# Altium PCB ArduinoUnoR3.PcbDoc (part 2 of 2)
Units mm, origin at the board's own origin, x right, y up, seen from the top; angles counter-clockwise.
Board outline 68.53 x 53.3 mm, 2 copper layers (Top Layer, Bottom Layer); 60 components, 49 nets, 221 pads, 41 vias.
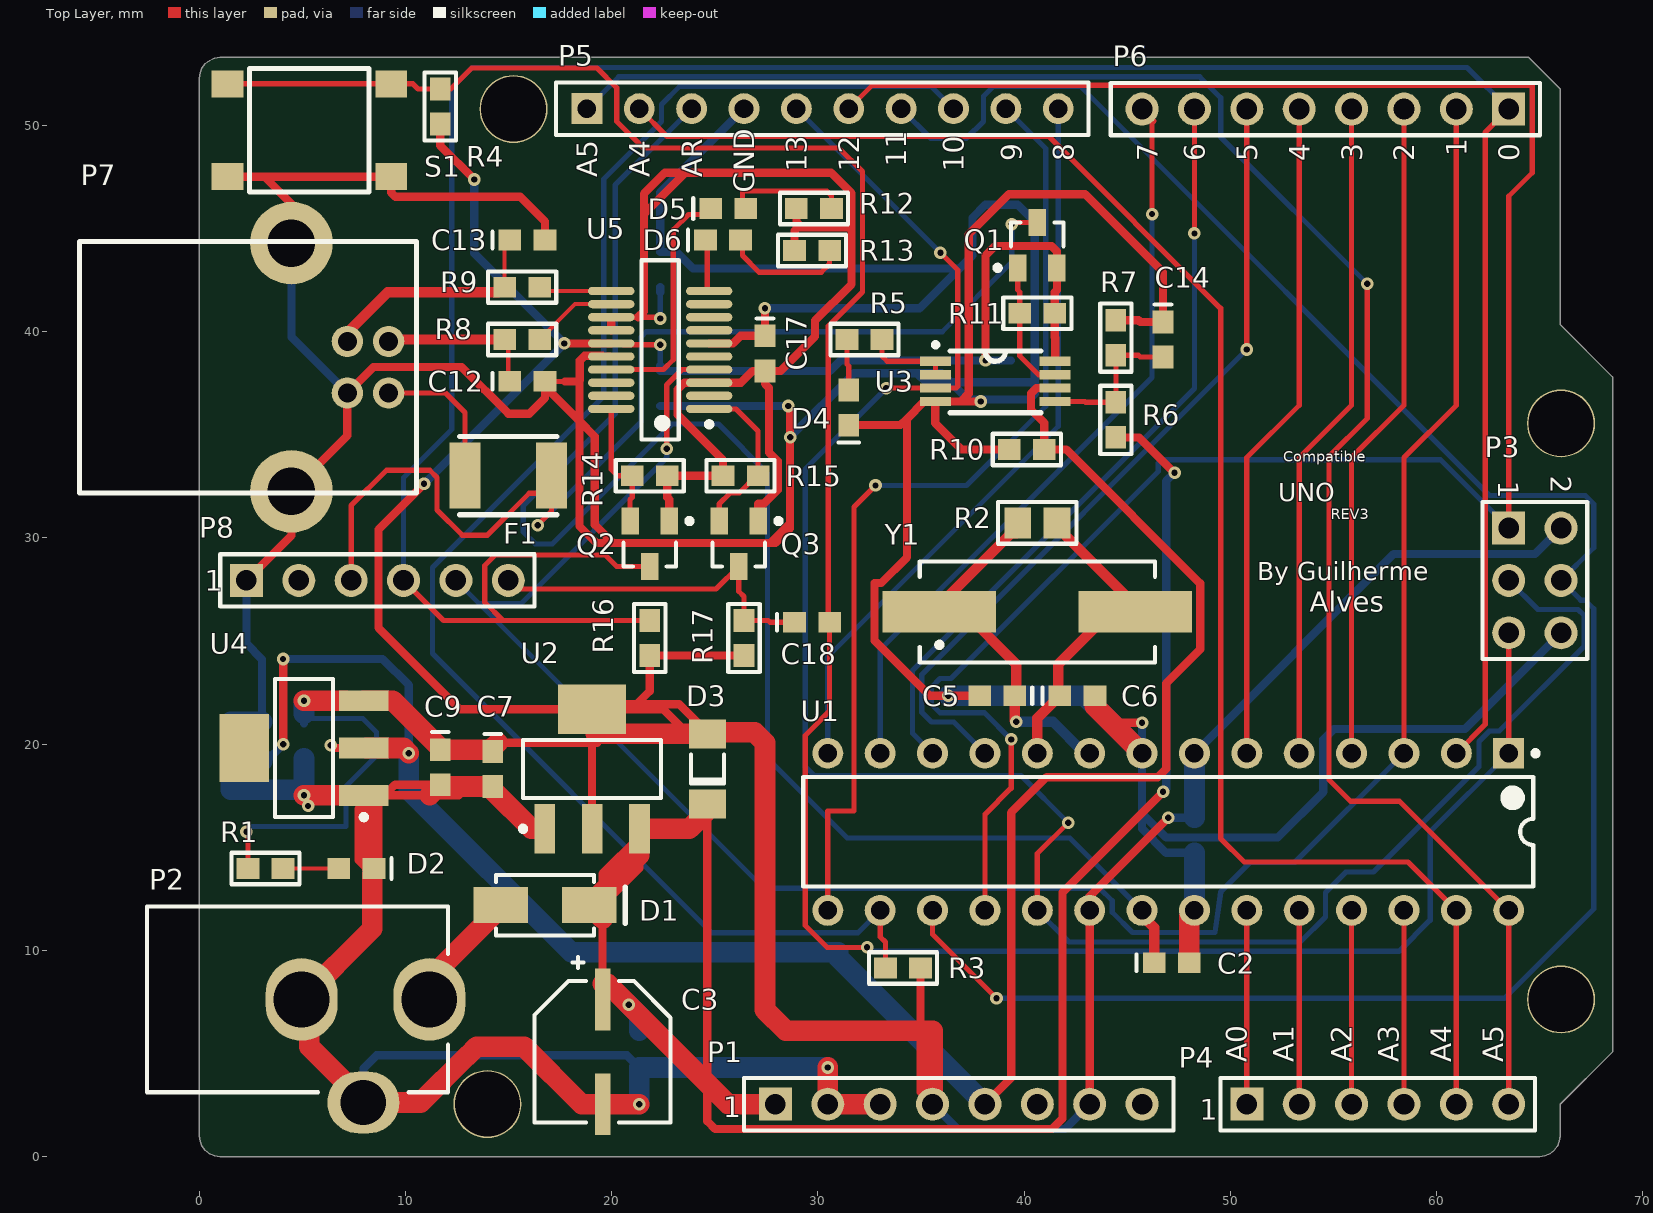
[diagram p0: Top Layer view]

## Part data (continued)
U5: "USB to Full-Handshake UART Interface Chip, UHCI/OHCI/EHCI Compatible, USB 2.0 Compatible, -40 to +85 degC, 20-Pin SSOP, Pb-Free, Tape and Reel", Case/Package=SSOP, Manufacturer=FTDI, Max Operating Temperature=85°C, Max Supply Voltage=5.5V, Min Operating Temperature=-40°C, Min Supply Voltage=2.97V, Operating Supply Current=8mA, Operating Supply Voltage=5V, Package Quantity=2000, Supplier Part Number 1=768-1129-6-ND, Code_JEDEC=MO-137-AD, ComponentLink1Description="Manufacturer URL", ComponentLink1URL=http://www.ftdichip.com/, ComponentLink2Description=Datasheet, ComponentLink2URL=http://www.ftdichip.com/Support/Documents/DataSheets/ICs/DS_FT231X.pdf, ComponentLink3Description="FT231X Product Page", ComponentLink3URL=www.ftdichip.com/Products/ICs/FT231X.html, ComponentLink4Description=http://uk.rs-online.com/webdocs/1102/0900766b811020d3.pdf, ComponentLink4URL=http://uk.rs-online.com/webdocs/1102/0900766b811020d3.pdf, ComponentLink5Description=https://media.digikey.com/pdf/Data%20Sheets/FTDI%20Chip%20PDFs/X-Chip_Series_Errata.pdf, ComponentLink5URL=https://media.digikey.com/pdf/Data%20Sheets/FTDI%20Chip%20PDFs/X-Chip_Series_Errata.pdf, ComponentLink6Description=http://www.alliedelec.com/images/products/datasheets/bm/FTDI/70403932.pdf, ComponentLink6URL=http://www.alliedelec.com/images/products/datasheets/bm/FTDI/70403932.pdf, Data Rate=12Mbps, DatasheetVersion="ver 1.2, Feb-2013", Height=0.059inch, Interface=UART,USB, Length=8.74mm, Manufacturer Part Number=FT231XS-R, Mount="Surface Mount", Number of Channels=1, Number of Pins=20, PackageDescription="20-Pin Small Outline Package, 8.6 x 3.9 mm Body, 0.635 mm Pitch", PackageReference=SSOP-20, PackageVersion=Feb-13, Packaging="Tape and Reel", PartNumber=FT231XS-R, Pricing 1="1=2.12, 25=2.05, 100=1.98, 250=1.78, 500=1.60002 (USD)", Radiation Hardening=No, Stock 1=8392, Supplier 1=Digi-Key, Weight=0.016oz, Width=0.157inch
Y1: library part XTAL, "Crystal Oscillator", ESR (Equivalent Series Resistance)=50R, Frequency Stability=50ppm, Frequency Tolerance=30ppm, Load Capacitance=20pF, Manufacturer Part Number=ECS-160-20-3X-TR, Max Operating Temperature=70°C, Min Operating Temperature=-10°C, Package Quantity=1, Supplier Part Number 1=XC1776DKR-ND, Frequency=16MHz, Height=0.091inch, Lead Free="Lead Free", Length=0.276inch, Mount="Surface Mount", Packaging="Tape and Reel", Pricing 1="1=0.38, 10=0.316, 50=0.2846, 100=0.253, 500=0.24036, 1000=0.2024 (USD)", Stock 1=30831, Supplier 1=Digi-Key, Termination=SMD/SMT, Tolerance=30ppm, Width=0.161inch

## Free pads (board coordinates)
  round 3.3 hole 3.15: 1(13.97,2.54) 2(66.04,7.62) 3(66.04,35.56) 4(15.24,50.8)

## Via types
v1: diameter 0.61, hole 0.305, Top Layer to Bottom Layer, 41 vias

## Nets (pads, with @x,y where several pads share a name; then routed paths per layer and width w, separated by ;. In a path a pad name is that pad's centre, name@x,y a point inside that pad or via, vN(x,y) a via of type N, cw(c..) or ccw(c..) an arc to the next point about the centre after c; other vN are vias at no path point)
+3V3D: C11.2 P1.5 R10.1 U3.6 U4.2 | length 102.9
  Top Layer w0.4: v1(4.064,24.13) 4.075,24.119 v1(4.075,19.995) ; v1(6.376,19.95) 6.514,19.812 U4.2 U4.2@8.128,19.812 ; P1.5 39.371,3.811 39.371,16.675 41.096,18.4 46.483,18.4 46.889,18.807 46.889,22.947 48.54,24.598 48.54,27.798 42.049,34.29 R10.1 40.982,35.571 40.336,36.216 40.336,37.013 40.59,37.267 U3.6
  Top Layer w1: U4.2@8.128,19.812 9.906,19.812 v1(10.16,19.558)
  Bottom Layer w0.4: C11.2 3.262,19.182 v1(4.075,19.995) ; v1(4.064,24.13) 8.89,24.13 10.16,22.86 v1(10.16,19.558) ; v1(6.376,19.95) v1@6.382,19.944
  Bottom Layer w1: C11.2 C11.2@3.048,19.304 ; v1(10.16,19.558) 10.16,17.78 18.034,9.906 30.988,9.906 30.988,9.652 P1.5
+3V3E: C15.2 C17.2 Q2.1 Q3.1 R12.2 R13.2 R14.1 R15.2 U5.3 U5.13 U5.14 | length 63.3
  Top Layer w0.254: U5.13 21.286,40.704 21.288,40.704 22.288,40.704 v1(22.352,40.64)
  Top Layer w0.4: U5.14 U5.13 ; 21.286,40.704 21.566,40.983 ; 21.288,40.704 21.566,40.981 21.566,40.983 ; Q2.1 22.794,31.862 22.694,31.962 R14.1 R15.2 25.4,33.768 23.191,35.977 23.191,37.198 23.521,37.529 U5.3 26.265,37.529 26.836,38.1 C17.2 ; Q3.1 27.112,31.659 27.39,31.659 28.05,32.319 28.05,33.725 27.627,34.148 27.627,37.281 27.432,37.476 C17.2 ; R13.2 28.868,44.892 28.956,44.98 28.956,45.324 ; R12.2 28.956,45.324 ; 21.566,40.983 21.566,45.705 ; 21.566,45.705 21.566,46.696 22.582,47.712 23.572,47.712 ; 21.566,45.705 23.572,47.712 ; 23.572,47.712 30.633,47.712 31.624,46.721 31.624,45.324 ; C17.2 28.195,38.1 29.863,39.768 29.863,40.541 31.624,42.302 31.624,45.324 ; 28.956,45.324 29.21,45.07 31.37,45.07 31.624,45.324
  Bottom Layer w0.254: v1(22.352,40.64) C15.2@22.352,41.91
  Bottom Layer w0.4: C15.2@22.352,41.91 C15.2
+5VD: C1.1 C7.1 C8.1 C9.1 C10.2 C16.1 D3.1 P1.4 P1.7 P3.2 Q1.2 R1.1 R3.1 R4.1 R11.2 R16.1 R17.2 U1.7 U1.20 U2.2 U3.8 U4.3 U5.15 | length 231.6
  Top Layer w0.254: v1(2.286,15.748) 2.364,15.67 R1.1 ; U4.3@7.112,22.098 7.126,22.112 U4.3 ; U5.15 20.51,39.434 20.574,39.37 v1(22.352,39.37)
  Top Layer w0.4: v1(10.898,32.624) 8.688,30.414 8.688,25.639 12.631,21.696 U2.2@19.05,21.696 ; C9.1@11.684,19.812 14.098,19.812 14.352,20.066 14.478,20.066 19.05,20.066 ; R4.1 11.684,49.034 v1(13.336,47.382) ; v1(17.705,39.434) U5.15 ; U2.2@19.05,15.896 19.05,16.002 19.05,20.066 ; U2.2@19.226,20.496 U2.2@20.426,21.696 ; 19.304,20.066 19.05,20.066 ; D3.1 23.693,20.496 22.493,21.696 20.974,21.696 ; D3.1@24.638,20.574 23.281,21.931 21.209,21.931 ; R17.2 R16.1 21.844,22.566 21.209,21.931 ; R3.1 34.974,6.096 34.974,3.126 P1.4 ; v1(38.126,38.608) 38.126,43.699 38.584,44.156 41.336,44.156 41.59,43.902 Q1.2 41.59,42.021 41.49,41.921 R11.2 41.49,39.729 41.508,39.711 U3.8 ; P1.7 U1.20 43.156,11.938 43.156,12.597 v1(46.991,16.432) ; 19.05,20.066 U2.2@19.05,21.696 ; U2.2@19.05,21.696 U2.2@20.426,21.696 ; U2.2@20.426,21.696 20.974,21.696 ; U2.2@20.426,21.696 20.661,21.931 21.209,21.931 ; 20.974,21.696 21.209,21.931
  Top Layer w1: v1(5.08,22.098) U4.3@7.112,22.098 ; U4.3 9.384,22.112 C9.1@11.684,19.812 ; C9.1 14.146,19.734 C7.1@14.224,19.812 ; C7.1 C7.1@14.224,19.812 ; C7.1@14.478,20.066 C7.1@14.224,19.812 ; U2.2@19.226,20.496 23.693,20.496 ; D3.1@24.638,20.574 26.924,20.574 27.432,20.066 27.432,7.112 28.448,6.096 34.974,6.096 35.56,6.096 P1.4
  Bottom Layer w0.254: v1(2.286,15.748) 2.54,16.002 7.112,16.002 7.112,17.956 8.592,19.436 8.592,20.574 7.927,21.239 5.177,21.239 5.08,21.142 5.05,21.112 C10.2 ; C16.1@22.352,38.354 v1(22.352,39.37)
  Bottom Layer w0.4: C10.2 5.08,21.142 C10.2@5.08,21.472 ; v1(10.898,32.624) 10.898,32.626 v1(17.705,39.434) 13.336,43.802 v1(13.336,47.382) ; C16.1@22.352,38.354 C16.1 30.583,38.1 31.091,38.608 v1(38.126,38.608) C8.1 ; P1.4 36.769,1.331 41.971,1.331 P1.7 ; v1(46.991,16.432) C1.1 ; U1.7 57.923,29.221 64.781,29.221 P3.2
  Bottom Layer w1: C10.2@5.08,21.472 v1(5.08,22.098) ; C1.1 U1.7
+VIN: C3.1 C4.1 D1.2 D3.2 P1.1 R6.1 U2.3 | length 105.2
  Top Layer w0.4: D1.2 D1.2@19.558,12.192 ; C3.1 19.558,8.382 19.558,11.548 D1.2@19.558,12.192 ; D1.2@19.559,12.192 21.35,13.983 U2.3 ; U2.3@21.336,15.494 19.558,13.716 19.558,12.836 D1.2@19.558,12.192 ; D3.2 24.638,16.764 24.638,3.556 24.638,1.713 25.02,1.331 41.352,1.331 41.86,1.839 41.86,12.812 v1(46.737,17.689) ; R6.1 45.577,34.876 v1(47.296,33.158)
  Top Layer w1: C3.1@19.558,8.382 19.812,8.382 v1(20.828,7.366) 24.638,3.556 25.654,2.54 P1.1 ; D1.2@19.558,11.548 D1.2 19.558,12.836 21.336,14.614 U2.3@21.336,15.494 ; U2.3 23.77,15.896 D3.2@24.638,16.764
  Bottom Layer w0.4: C4.1@21.336,5.88 C4.1 C4.1@21.336,6.096 ; v1(46.737,17.689) 46.889,17.841 46.889,32.751 v1(47.296,33.158)
  Bottom Layer w1: v1(20.828,7.366) 21.336,6.858 C4.1@21.336,6.096
A0: P4.1 U1.23 | length 9.4
  Top Layer w0.254: P4.1 U1.23
A1: P4.2 U1.24 | length 9.4
  Top Layer w0.254: P4.2 U1.24
A2: P4.3 U1.25 | length 9.4
  Top Layer w0.254: P4.3 U1.25
A3: P4.4 U1.26 | length 9.4
  Top Layer w0.254: P4.4 U1.26
A4_SDA: P4.5 P5.2 U1.27 | length 80.2
  Top Layer w0.254: P5.2 22.69,49.463 41.201,49.463 49.531,41.133 49.531,15.428 50.674,14.285 58.613,14.285 U1.27 P4.5
A5_SCL: P4.6 P5.1 U1.28 | length 89.3
  Top Layer w0.254: v1(56.643,42.327) 56.643,35.799 54.789,33.945 54.789,18.273 55.83,17.232 58.206,17.232 U1.28 P4.6
  Bottom Layer w0.254: P5.1 20.339,52.36 48.515,52.36 49.531,51.344 49.531,49.439 v1(56.643,42.327)
AREF: C2.1 P5.3 U1.21 | length 77.6
  Top Layer w0.254: U1.21@45.466,11.938 U1.21
  Top Layer w0.5: U1.21@45.466,11.938 45.593,11.811 46.306,11.098 C2.1
  Bottom Layer w0.254: P5.3 20.169,47.109 20.169,36.012 15.714,31.557 15.714,30.287 16.298,29.703 17.121,29.703 22.937,35.52 25.172,35.52 27.56,33.132 27.56,19.315 31.426,15.448 42.21,15.448 U1.21
D0_RX: P6.1 P8.4 Q2.3 R16.2 U1.2 | length 133.9
  Top Layer w0.254: P8.4 11.85,25.996 14.732,25.996 ; R16.2 14.732,25.996 ; Q2.3 21.844,28.611 20.245,28.611 19.686,29.17 14.352,29.17 13.844,28.662 13.844,26.884 14.732,25.996 ; U1.2 62.358,20.956 62.358,49.658 P6.1
  Bottom Layer w0.254: P8.4 9.906,32.922 12.244,35.259 12.244,51.827 13.234,52.817 61.483,52.817 P6.1
D1_TX: P6.2 P8.5 U1.3 U5.4 | length 108.1
  Top Layer w0.254: v1(22.664,34.32) 22.664,37.417 23.411,38.164 U5.4 ; U1.3 58.42,33.894 60.96,36.434 P6.2
  Bottom Layer w0.254: P8.5 13.578,26.808 ; v1(22.664,34.32) 22.664,33.875 15.597,26.808 13.578,26.808 ; U1.3 53.117,14.255 50.953,14.255 49.531,12.833 49.256,10.861 45.264,10.861 44.273,11.852 44.273,12.406 43.664,13.015 27.371,13.015 13.578,26.808
D2: P6.3 U1.4 | length 32.3
  Top Layer w0.254: U1.4 55.88,33.894 58.42,36.434 P6.3
D3: P6.4 U1.5 | length 32.3
  Top Layer w0.254: U1.5 53.34,33.894 55.88,36.434 P6.4
D4: P6.5 U1.6 | length 32.3
  Top Layer w0.254: U1.6 50.8,33.894 53.34,36.434 P6.5
D5: P6.6 U1.11 | length 39.7
  Top Layer w0.254: v1(50.8,39.138) P6.6
  Bottom Layer w0.254: U1.11 36.587,21.071 35.51,21.071 35.041,21.54 35.041,23.379 v1(50.8,39.138)
D6: P6.7 U1.12 | length 37.3
  Top Layer w0.254: v1(48.26,44.766) P6.7
  Bottom Layer w0.254: U1.12 34.587,20.531 34.587,23.57 48.26,37.243 v1(48.26,44.766)
D7: P6.8 U1.13 | length 37
  Top Layer w0.254: P6.8 46.302,50.218 46.204,50.12 v1(46.204,45.705)
  Bottom Layer w0.254: U1.13 33.02,24.597 46.204,37.78 v1(46.204,45.705)
D8: P5.10 U1.14 | length 35.9
  Bottom Layer w0.254: U1.14 30.48,24.241 41.656,35.417 P5.10
D9: P5.9 U1.15 | length 47.5
  Top Layer w0.254: U1.15 30.48,16.764 31.75,16.764 31.75,31.496 v1@32.766,32.512 ; v1@32.634,32.39 v1@32.761,32.517
  Bottom Layer w0.254: v1(32.792,32.548) 37.212,32.548 41.047,36.383 41.047,48.886 P5.9
D10_SS: P5.8 R3.2 U1.16 | length 76.9
  Top Layer w0.254: U1.16 33.02,10.653 33.274,10.399 R3.2
  Bottom Layer w0.254: U1.16 31.938,10.856 24.842,10.856 11.304,24.395 11.304,28.56 19.61,36.866 19.61,47.398 22.413,50.201 22.413,51.014 23.302,51.903 35.49,51.903 P5.8
D11_MOSI: P3.4 P5.7 U1.17 | length 101.7
  Top Layer w0.254: U1.17 35.56,10.781 v1(38.66,7.681)
  Bottom Layer w0.254: P5.7 35.464,49.388 37.212,49.388 38.025,50.201 38.025,51.42 38.507,51.903 42.724,51.903 62.566,32.061 67.209,32.061 67.621,31.649 67.621,29.521 P3.4 66.999,26.981 67.209,26.981 67.621,26.569 67.621,12.005 63.298,7.681 v1(38.66,7.681)
D12_MISO: P3.1 P5.6 U1.18 | length 103.9
  Top Layer w0.254: P5.6 32.633,51.954 64.619,51.954 64.644,51.928 64.644,47.712 63.5,46.568 P3.1 ; U1.18 38.1,16.596 39.371,17.867 v1(39.371,20.23)
  Bottom Layer w0.254: v1(39.371,20.23) 38.076,21.525 35.917,21.525 35.495,21.947 35.495,22.757 35.917,23.179 36.454,23.179 46.508,33.234 46.508,33.637 46.661,33.789 60.191,33.789 P3.1
D13_SCK: P3.3 P5.5 U1.19 U3.3 | length 99.3
  Top Layer w0.254: v1(33.32,37.267) U3.3 36.703,37.267 36.785,37.349 36.785,42.988 v1(35.942,43.831) ; U1.19 40.64,14.691 v1(42.14,16.19)
  Bottom Layer w0.254: P5.5 v1(35.942,43.831) ; v1(33.32,37.267) 29.389,33.335 29.389,18.908 29.821,18.476 39.854,18.476 v1(42.14,16.19) ; U1.19 42.171,10.407 53.392,10.407 54.611,11.626 54.611,12.812 55.602,13.803 56.948,13.803 62.053,18.908 62.053,20.127 62.561,20.635 63.044,20.635 67.167,24.759 67.167,26.223 66.863,26.527 64.913,26.527 P3.3
DTR: C18.1 P8.6 Q3.3 R17.1 | length 17.2
  Top Layer w0.254: P8.6 14.986,27.686 15.153,27.519 25.063,27.519 Q3.3 26.162,27.417 26.416,27.163 R17.1 27.585,25.996 27.673,25.908 C18.1
GND: C1.2 C2.2 C3.2 C4.2 C5.2 C6.2 C7.2 C8.2 C9.2 C10.1 C11.1 C12.2 C13.2 C14.1 C15.1 C16.2 C17.1 D2.2 D4.2 P1.2 P1.3 P2.2 P2.3 P3.6 P5.4 P7.4 P7.5 P7.6 P8.1 R7.2 R10.2 S1.1 U1.8 U1.22 U2.1 U3.4 U4.1 U5.6 U5.16 | length 402.6
  Top Layer w0.254: D2.2@8.382,13.97 D2.2 ; C12.2@16.51,37.592 C12.2 17.735,37.592 ; U5.16@19.222,38.862 19.914,38.862 U5.16
  Top Layer w0.4: S1.1@1.359,47.521 3.151,47.521 ; P8.1 4.47,30.124 P7.6 7.18,34.968 P7.4 8.441,38.288 12.726,38.288 14.987,36.028 16.003,36.028 16.764,36.789 C12.2@16.764,37.338 ; P7.5@4.47,44.298 4.47,46.201 3.151,47.521 ; P2.2 4.96,6.858 P2.2@5.334,6.858 ; v1(5.275,17.003) 5.798,17.526 7.966,17.526 U4.1@8.382,17.526 ; U4.1 U4.1@8.368,17.512 ; D2.2@8.382,13.716 7.723,14.375 7.723,16.867 U4.1@8.368,17.512 ; D2.2 8.47,17.003 ; C9.2 9.501,18.034 U4.1@8.993,17.526 ; C7.2@14.224,17.78 12.831,17.78 12.577,17.526 11.176,17.526 U4.1@8.993,17.526 ; C12.2@16.51,37.592 C12.2@16.764,37.338 ; C12.2 C12.2@16.764,37.338 ; C13.2 16.764,45.35 15.57,46.543 9.512,46.543 9.309,46.747 9.309,47.521 3.151,47.521 ; 17.735,37.592 18.391,37.592 18.452,37.653 18.452,38.606 18.68,38.834 U5.16@19.558,38.834 ; 18.441,37.541 18.441,35.661 ; U5.6 25.884,39.434 26.25,39.8 C17.1 v1(27.432,41.133) ; v1(28.559,36.4) 28.65,36.309 28.65,30.692 ; v1(28.652,34.885) 28.652,30.694 28.65,30.692 ; D4.2 34.01,35.472 34.316,35.779 ; C5.2 v1(36.322,22.352) 35.404,22.352 32.74,25.016 32.74,27.816 33.072,27.816 34.316,29.061 34.316,35.779 ; v1(37.898,36.617) 36.936,36.617 ; R10.2 36.969,34.29 35.688,35.571 U3.4@35.688,36.617 ; C6.2 43.434,21.844 43.434,21.652 44.045,21.042 44.236,21.042 v1(45.721,21.042) ; R7.2 45.543,40.562 45.631,40.474 C14.1 46.736,42.887 42.952,46.67 39.269,46.67 37.312,44.713 37.312,36.993 36.936,36.617 ; U4.1@8.368,17.512 8.382,17.512 8.47,17.512 8.47,17.003 ; U4.1@8.368,17.512 U4.1@8.382,17.526 ; U4.1@8.382,17.526 8.89,17.526 U4.1@8.993,17.526 ; 8.47,17.003 U4.1@8.993,17.526 ; C12.2@16.764,37.338 18.441,35.661 ; 18.441,35.661 18.441,30.567 19.254,29.754 20.067,29.754 ; 18.441,35.661 19.178,34.924 19.178,30.643 20.067,29.754 ; 20.067,29.754 27.712,29.754 ; 27.712,29.754 28.65,30.692 ; 27.712,29.754 27.941,29.754 28.65,30.463 28.65,30.692 ; 34.316,35.779 35.155,36.617 U3.4@35.688,36.617 ; U3.4@35.688,36.617 U3.4 36.936,36.617
  Top Layer w1: P2.2 8.382,11.042 D2.2@8.382,13.716 ; v1(5.08,17.526) 7.966,17.526 U4.1 ; P2.2@5.334,6.858 5.334,5.334 7.96,2.708 P2.3 10.727,2.62 12.997,4.89 13.018,4.89 13.462,5.334 15.748,5.334 18.542,2.54 C3.2 19.812,2.54 v1(21.336,2.54) ; D2.2@8.382,13.97 8.382,17.512 U4.1@8.382,17.526 ; 11.176,17.526 C9.2 11.772,17.946 C7.2 ; C7.2@14.224,17.78 16.108,15.896 U2.1 ; v1(30.48,4.318) P1.2 P1.3 ; 43.434,21.844 44.236,21.042 U1.8 ; C2.2 48.006,11.684 U1.22
  Bottom Layer w0.4: P8.1 2.286,24.877 3.048,24.115 C11.1 ; P7.5@4.47,44.298 4.47,39.738 P7.4 ; 4.498,17.78 v1(5.275,17.003) ; P2.3 7.96,4.278 8.595,4.913 20.741,4.913 C4.2@21.336,4.318 ; C16.2 v1(28.559,36.4) ; P5.4 22.352,46.753 C15.1 23.14,43.864 23.941,43.064 36.856,43.064 ; v1(27.432,41.133) 34.926,41.133 36.856,43.064 ; v1(28.652,34.885) 31.751,37.984 34.799,37.984 ; v1(37.898,36.617) v1@37.989,36.708 ; U1.8 45.72,15.901 46.889,14.732 C1.2 ; v1(45.721,21.042) 45.721,16.648 46.889,15.479 52.3,15.479 54.509,17.689 54.509,20.229 55.017,20.737 61.377,20.737 P3.6 ; 34.799,37.984 35.993,37.984 36.425,37.552 ; 34.799,37.984 35.231,37.552 36.425,37.552 ; 36.425,37.552 40.52,37.552 ; 36.425,37.552 37.268,36.708 v1@37.989,36.708 ; 36.856,43.064 37.491,43.699 37.491,45.527 38.126,46.162 39.682,46.162 40.52,45.324 40.52,37.552 ; v1@37.989,36.708 C8.2 40.235,36.708 40.52,36.993 40.52,37.552
  Bottom Layer w1: C11.1 1.524,21.082 1.524,17.78 4.498,17.78 ; v1(5.08,17.526) C10.1 ; v1(21.336,2.54) C4.2 ; C4.2@21.336,4.318 C4.2 ; v1(30.48,4.318) 21.424,4.318 C4.2 ; v1(36.322,22.352) 42.926,22.352 U1.8 ; U1.22 C1.2
NetC5_1: C5.1 R2.2 U1.9 Y1.1 | length 18.1
  Top Layer w0.254: C5.1 39.498,22.352 39.498,22.86 39.624,22.86 ; R2.2@39.624,30.226 39.69,30.226 R2.2
  Top Layer w0.5: C5.1 39.546,21.16 v1(39.624,21.082) ; 39.624,22.86 39.624,23.876 37.084,26.416 Y1.1 35.89,26.746 39.37,30.226 R2.2@39.624,30.226
  Bottom Layer w0.254: U1.9@42.926,19.558 U1.9
  Bottom Layer w0.5: v1(39.624,21.082) 41.402,21.082 U1.9@42.926,19.558
NetC6_1: C6.1 R2.1 U1.10 Y1.2 | length 15.6
  Top Layer w0.254: R2.1 41.59,30.48 R2.1@41.656,30.48
  Top Layer w0.5: U1.10 40.64,21.258 C6.1 41.656,22.352 41.656,23.876 43.942,26.162 45.136,26.162 Y1.2 45.39,26.746 R2.1@41.656,30.48
NetC12_1: C12.1 P7.2 R8.2 | length 8.1
  Top Layer w0.2: R8.2@14.986,39.624 14.986,37.846 15.152,37.68 15.152,37.592 C12.1
  Top Layer w0.254: R8.2@14.76,39.624 R8.2 R8.2@14.986,39.624
  Top Layer w0.5: P7.2 9.144,39.624 R8.2@14.76,39.624
NetC13_1: C13.1 P7.3 R9.2 | length 11.7
  Top Layer w0.2: R9.2 14.81,44.02 C13.1@15.24,44.45
  Top Layer w0.254: C13.1 C13.1@15.24,44.45
  Top Layer w0.5: P7.3 7.112,39.624 7.112,39.878 9.144,41.91 14.478,41.91 14.732,42.164 R9.2
NetC14_2: C14.2 R6.2 R7.1 U3.5 | length 7.6
  Top Layer w0.254: U3.5 42.952,36.617 42.993,36.576 R6.2 R7.1 45.543,38.862 45.631,38.774 C14.2
NetD1_1: D1.1 P2.1 | length 6.1
  Top Layer w0.4: D1.1@14.478,11.938 14.478,12.192 D1.1
  Top Layer w1: P2.1 11.16,8.62 D1.1@14.478,11.938
NetD2_1: D2.1 R1.2 | length 2.8
  Top Layer w0.2: R1.2 D2.1 D2.1@6.858,13.97
NetD4_1: D4.1 R5.2 | length 2.5
  Top Layer w0.254: R5.2 31.408,38.427 31.496,38.339 D4.1
NetD5_1: D5.1 R12.1 | length 6
  Top Layer w0.254: D5.1 26.504,46.228 26.338,46.228 26.338,46.823 30.43,46.823 30.656,46.597 R12.1
NetD5_2: D5.2 U5.17 | length 12.4
  Top Layer w0.254: U5.17 22.508,38.164 22.988,38.644 22.988,44.943 23.725,45.68 24.638,45.68 24.638,46.228 24.804,46.228 D5.2
NetD6_1: D6.1 R13.1 | length 6.7
  Top Layer w0.254: D6.1 26.25,44.704 26.338,44.704 26.338,43.699 27.151,42.886 30.162,42.886 30.568,43.292 R13.1
NetD6_2: D6.2 U5.10 | length 3.3
  Top Layer w0.254: D6.2 24.384,44.45 24.384,44.704 24.638,44.45 24.638,42.063 U5.10
NetF1_1: F1.1 P7.1 | length 7.2
  Top Layer w0.254: P7.1 11.939,37.028 12.886,36.081 F1.1
NetQ1_1: Q1.1 R11.1 U3.7 | length 6.4
  Top Layer w0.254: Q1.1 39.69,42.021 39.79,41.921 R11.1 39.79,38.822 40.695,37.917 U3.7
NetQ2_2: Q2.2 R14.2 U5.20 | length 6.3
  Top Layer w0.254: U5.20 19.977,33.313 20.27,33.02 R14.2 20.994,31.962 20.894,31.862 Q2.2
NetQ3_2: Q3.2 R15.1 U5.1 | length 8.3
  Top Layer w0.254: U5.1 26.022,36.259 27.1,35.181 R15.1 27.02,33.02 26.193,32.192 25.757,32.192 25.212,31.648 Q3.2
NetR5_1: R5.1 U3.1 U3.2 | length 4.2
  Top Layer w0.254: R5.1 33.108,38.822 33.363,38.567 U3.1 U3.2
NetR8_1: R8.1 U5.12 | length 4.2
  Top Layer w0.2: R8.1 18.225,41.339 U5.12
NetR9_1: R9.1 U5.11 | length 3.5
  Top Layer w0.2: R9.1@16.764,42.164 16.954,41.974 U5.11
  Top Layer w0.254: R9.1 R9.1@16.764,42.164
R\S\T\: C18.2 P3.5 R4.2 S1.2 U1.1 | length 119.1
  Top Layer w0.254: S1.2@1.359,52.021 9.309,52.021 10.364,52.021 10.611,51.774 R4.2 12.193,51.774 13.211,52.792 19.28,52.792 20.245,51.827 20.245,50.201 21.54,48.906 31.014,48.906 32.157,47.763 32.157,41.921 30.506,40.27 30.506,26.188 30.48,26.162 30.568,26.162 C18.2 30.568,21.601 29.389,20.421 29.389,11.212 30.456,10.145 v1(32.386,10.145) ; U1.1 P3.5
  Bottom Layer w0.254: v1(32.386,10.145) 32.578,9.953 58.178,9.953 59.691,11.466 59.691,15.749 U1.1
RST: P1.6
USB+: F1.2 P8.3 Q1.3 | length 53.6
  Top Layer w0.254: P8.3 7.366,31.567 9.08,33.281 11.177,33.281 11.529,32.929 11.529,31.357 12.752,30.135 13.971,30.135 16.003,32.167 F1.2@17.086,32.167 ; v1(16.409,30.618) 17.086,31.294 F1.2@17.086,32.167 ; F1.2 F1.2@17.086,32.167 ; v1(39.396,45.223) 39.47,45.296 Q1.3
  Bottom Layer w0.254: v1(16.409,30.618) 21.42,35.629 21.42,39.743 21.679,40.002 36.03,40.002 39.396,43.368 v1(39.396,45.223)
pads on no net: P1.8 P8.2 U4.4 U5.2 U5.5 U5.7 U5.8 U5.9 U5.18 U5.19

## Silkscreen, mask and mechanical layers (free items; w line width, h text height)
Top Overlay:
  text "1" at 61.468,48.514 h1 r90
  text "9" at 39.878,48.26 h1 r90
  text "8" at 42.418,48.26 h1 r90
  text "7" at 46.482,48.26 h1 r90
  text "6" at 48.768,48.26 h1 r90
  text "5" at 51.308,48.26 h1 r90
  text "4" at 53.848,48.26 h1 r90
  text "3" at 56.388,48.26 h1 r90
  text "2" at 58.928,48.26 h1 r90
  text "11" at 34.29,48.006 h1 r90
  text "13" at 29.464,47.752 h1 r90
  text "12" at 32.004,47.752 h1 r90
  text "10" at 37.084,47.752 h1 r90
  text "A4" at 21.844,47.498 h1 r90
  text "AR" at 24.384,47.498 h1 r90
  text "GND" at 26.924,46.736 h1 r90
  text "Compatible" at 52.578,33.528 h0.89
  text "UNO" at 52.324,31.496 h1.52
  text "REV3" at 54.864,30.734 h0.89
  text "By Guilherme" at 51.308,27.94 h0.89
  text "Alves" at 53.848,26.416 h0.97
  text "A0" at 50.8,4.572 h1 r90
  text "A1" at 53.086,4.572 h1 r90
  text "A2" at 55.88,4.572 h1 r90
  text "A3" at 58.166,4.572 h1 r90
  text "A4" at 60.706,4.572 h1 r90
  text "A5" at 63.246,4.572 h1 r90
Mechanical 2:
  drawing of 724 lines, arcs and shapes, not listed
Mechanical 3:
  drawing of 220 lines, arcs and shapes, not listed
  text "Layer" at 79.003,68.326 h1.52
  text "Name" at 89.414,68.326 h1.52
  text "Material" at 113.03,68.326 h1.52
  text "Thickness" at 134.868,68.326 h1.52
  text "Constant" at 151.374,68.326 h1.52
  text "Board Layer Stack" at 165.848,68.326 h1.52
  text "1" at 79.003,65.278 h1.52
  text "Top Overlay" at 89.414,65.278 h1.52
  text "2" at 79.003,62.23 h1.52
  text "Top Solder" at 89.414,62.23 h1.52
  text "Solder Resist" at 113.03,62.23 h1.52
  text "0,40mil" at 134.868,62.23 h1.52
  text "3,5" at 151.374,62.23 h1.52
  text "3" at 79.003,59.182 h1.52
  text "Top Layer" at 89.414,59.182 h1.52
  text "Copper" at 113.03,59.182 h1.52
  text "1,40mil" at 134.868,59.182 h1.52
  text "4" at 79.003,56.134 h1.52
  text "Dielectric 1" at 89.414,56.134 h1.52
  text "FR-4" at 113.03,56.134 h1.52
  text "12,60mil" at 134.868,56.134 h1.52
  text "4,8" at 151.374,56.134 h1.52
  text "5" at 79.003,53.086 h1.52
  text "Bottom Layer" at 89.414,53.086 h1.52
  text "Copper" at 113.03,53.086 h1.52
  text "1,40mil" at 134.868,53.086 h1.52
  text "6" at 79.003,50.038 h1.52
  text "Bottom Solder" at 89.414,50.038 h1.52
  text "Solder Resist" at 113.03,50.038 h1.52
  text "0,40mil" at 134.868,50.038 h1.52
  text "3,5" at 151.374,50.038 h1.52
  text "7" at 79.003,46.99 h1.52
  text "Bottom Overlay" at 89.414,46.99 h1.52
Mechanical 4:
  circle w0.006: c0,5.078 r0.003
  circle w0.006: c68.535,5.078 r0.003
  circle w0.006: c-5.756,0 r0.003
  circle w0.006: c0.994,0 r0.003
  circle w0.006: c0.994,53.3 r0.003
Mechanical 15:
  the board outline again, w0.508
Drill Drawing:
  circle w0.254: c79.772,29.358 r0.847
  lines w0.254: 78.925,5.651 80.619,5.651 80.619,7.345 78.925,7.345 78.925,5.651 ; 78.925,9.461 79.772,9.885 80.619,9.461 80.195,10.308 80.619,11.155 79.772,10.731 78.925,11.155 79.349,10.308 78.925,9.461 ; 78.925,13.695 79.349,13.695 79.772,13.271 80.195,13.695 80.619,13.695 80.195,14.118 80.619,14.541 80.195,14.541 79.772,14.965 79.349,14.541 78.925,14.541 79.349,14.118 78.925,13.695 ; 78.925,17.928 79.772,17.081 80.619,17.928 79.772,18.775 78.925,17.928 ; 78.925,20.892 80.619,20.892 80.619,22.585 78.925,22.585 78.925,20.892 ; 78.925,24.701 78.925,25.125 79.349,25.548 78.925,25.971 78.925,26.395 79.349,26.395 79.772,25.971 80.195,26.395 80.619,26.395 80.619,25.971 80.195,25.548 80.619,25.125 80.619,24.701 80.195,24.701 79.772,25.125 79.349,24.701 78.925,24.701 ; 78.925,32.745 79.349,32.745 79.349,32.322 80.195,32.322 80.195,32.745 80.619,32.745 80.619,33.591 80.195,33.591 80.195,34.015 79.349,34.015 79.349,33.591 78.925,33.591 78.925,32.745 ; 78.925,37.825 80.619,37.825 79.772,36.131 78.925,37.825 ; 79.264,5.99 80.28,5.99 80.28,7.006 79.264,7.006 79.264,5.99
  lines w0.381: 77.406,4.508 267.143,4.508 ; 77.406,38.798 267.143,38.798 ; 91.399,0.699 91.399,42.608 ; 106.381,0.699 106.381,42.608 ; 136.09,0.699 136.09,42.608 ; 148.939,0.699 148.939,42.608 ; 167.578,0.699 167.578,42.608 ; 205.666,0.699 205.666,42.608 ; 220.649,0.699 220.649,42.608 ; 239.592,0.699 239.592,42.608 ; 77.406,0.699 267.143,0.699 267.143,42.608 77.406,42.608 77.406,0.699
  text "Symbol" at 79.692,39.941 h1.83
  text "Count" at 92.542,39.941 h1.83
  text "Hole Size" at 107.524,39.941 h1.83
  text "Plated" at 137.233,39.941 h1.83
  text "Hole Type" at 150.082,39.941 h1.83
  text "Drill Layer Pair" at 168.721,39.941 h1.83
  text "Via/Pad" at 206.809,39.941 h1.83
  text "Pad Shape" at 221.792,39.941 h1.83
  text "Template" at 240.735,39.941 h1.83
  text "1" at 92.542,36.131 h1.52
  text "30,00mil (0,762mm)" at 107.524,36.131 h1.52
  text "PTH" at 137.233,36.131 h1.52
  text "Round" at 150.082,36.131 h1.52
  text "Top Layer - Bottom Layer" at 168.721,36.131 h1.52
  text "Pad" at 206.809,36.131 h1.52
  text "Rounded" at 221.792,36.131 h1.52
  text "c152h76" at 240.735,36.131 h1.52
  text "1" at 92.542,32.322 h1.52
  text "86,61mil (2,200mm)" at 107.524,32.322 h1.52
  text "PTH" at 137.233,32.322 h1.52
  text "Round" at 150.082,32.322 h1.52
  text "Top Layer - Bottom Layer" at 168.721,32.322 h1.52
  text "Pad" at 206.809,32.322 h1.52
  text "Rounded" at 221.792,32.322 h1.52
  text "r350_300h220r100" at 240.735,32.322 h1.52
  text "2" at 92.542,28.511 h1.52
  text "90,55mil (2,300mm)" at 107.524,28.511 h1.52
  text "PTH" at 137.233,28.511 h1.52
  text "Round" at 150.082,28.511 h1.52
  text "Top Layer - Bottom Layer" at 168.721,28.511 h1.52
  text "Pad" at 206.809,28.511 h1.52
  text "Rounded" at 221.792,28.511 h1.52
  text "c400h230" at 240.735,28.511 h1.52
  text "2" at 92.542,24.701 h1.52
  text "106,30mil (2,700mm)" at 107.524,24.701 h1.52
  text "PTH" at 137.233,24.701 h1.52
  text "Round" at 150.082,24.701 h1.52
  text "Top Layer - Bottom Layer" at 168.721,24.701 h1.52
  text "Pad" at 206.809,24.701 h1.52
  text "Rounded" at 221.792,24.701 h1.52
  text "r350_400h270r100" at 240.735,24.701 h1.52
  text "4" at 92.542,20.892 h1.52
  text "36,22mil (0,920mm)" at 107.524,20.892 h1.52
  text "PTH" at 137.233,20.892 h1.52
  text "Round" at 150.082,20.892 h1.52
  text "Top Layer - Bottom Layer" at 168.721,20.892 h1.52
  text "Pad" at 206.809,20.892 h1.52
  text "Rounded" at 221.792,20.892 h1.52
  text "c152h92" at 240.735,20.892 h1.52
  text "4" at 92.542,17.081 h1.52
  text "124,02mil (3,150mm)" at 107.524,17.081 h1.52
  text "PTH" at 137.233,17.081 h1.52
  text "Round" at 150.082,17.081 h1.52
  text "Top Layer - Bottom Layer" at 168.721,17.081 h1.52
  text "Pad" at 206.809,17.081 h1.52
  text "Rounded" at 221.792,17.081 h1.52
  text "c330h315" at 240.735,17.081 h1.52
  text "34" at 92.542,13.271 h1.52
  text "39,37mil (1,000mm)" at 107.524,13.271 h1.52
  text "PTH" at 137.233,13.271 h1.52
  text "Round" at 150.082,13.271 h1.52
  text "Top Layer - Bottom Layer" at 168.721,13.271 h1.52
  text "Pad" at 206.809,13.271 h1.52
  text "(Mixed)" at 221.792,13.271 h1.52
  text "(Mixed)" at 240.735,13.271 h1.52
  text "38" at 92.542,9.461 h1.52
  text "35,43mil (0,900mm)" at 107.524,9.461 h1.52
  text "PTH" at 137.233,9.461 h1.52
  text "Round" at 150.082,9.461 h1.52
  text "Top Layer - Bottom Layer" at 168.721,9.461 h1.52
  text "Pad" at 206.809,9.461 h1.52
  text "(Mixed)" at 221.792,9.461 h1.52
  text "(Mixed)" at 240.735,9.461 h1.52
  text "41" at 92.542,5.651 h1.52
  text "12,00mil (0,305mm)" at 107.524,5.651 h1.52
  text "PTH" at 137.233,5.651 h1.52
  text "Round" at 150.082,5.651 h1.52
  text "Top Layer - Bottom Layer" at 168.721,5.651 h1.52
  text "Via" at 206.809,5.651 h1.52
  text "Rounded" at 221.792,5.651 h1.52
  text "v61h30" at 240.735,5.651 h1.52
  text "127 Total" at 92.542,1.841 h1.52

## Dimensions
0,0.994 to 68.535,5.078 on Mechanical 3

## Text inside footprints (layer, text, board x,y; h text height)
P1: Top Overlay "1" at 25.4,1.905 h1
P3: Top Overlay "2" at 65.532,33.02 h1 r270; Top Overlay "1" at 62.992,32.766 h1 r270
P4: Top Overlay "1" at 48.514,1.778 h1
P5: Top Overlay "A5" at 19.304,47.498 h1 r90
P6: Top Overlay "0" at 64.008,48.26 h1 r90
P8: Top Overlay "1" at 0.254,27.432 h1